# Altium PCB Tigershark 3D.PcbDoc (part 3 of 3)
Units mil, origin at the board's own origin, x right, y up, seen from the top; angles counter-clockwise.
Board outline 6000 x 4000 mil, 4 copper layers (Top Layer, Groun Plane, Power Plane, Bottom Layer); 251 components, 259 nets, 1002 pads, 1752 vias.
Unrouted connection lines stored in the file: 937.
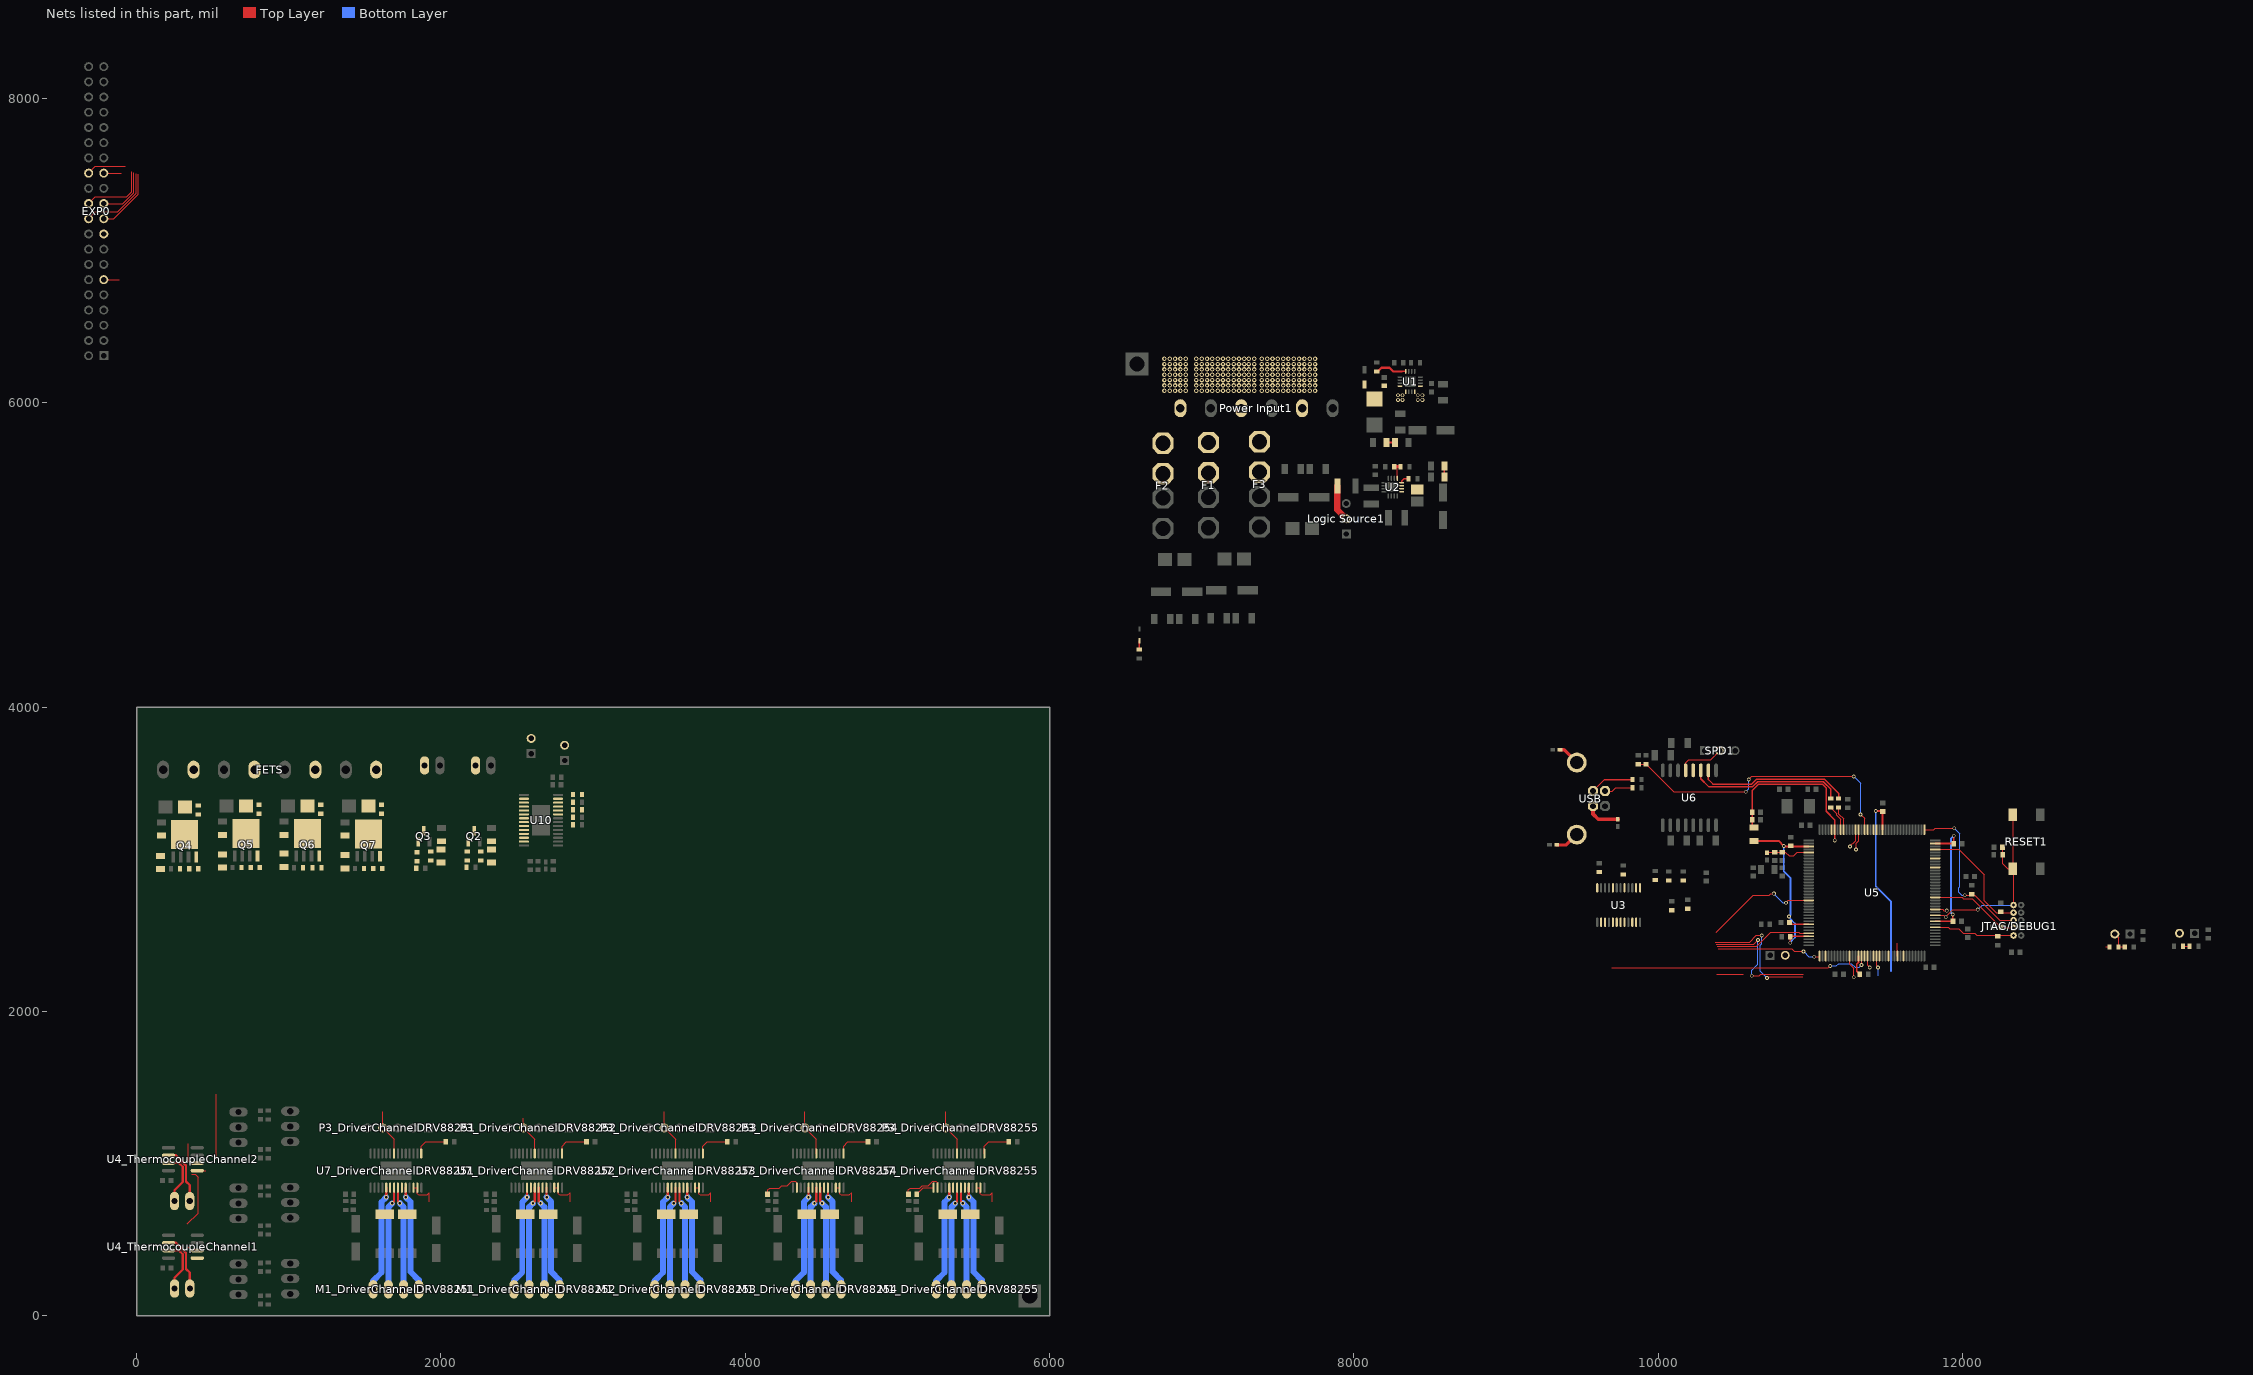
[diagram p5: the nets of this part, all layers, seen from the top]

## Via types
v1: diameter 30, hole 15, Top Layer to Bottom Layer, 1261 vias
v2: diameter 25, hole 15, Top Layer to Bottom Layer, 375 vias
v3: diameter 19.68, hole 7.87, Top Layer to Bottom Layer, 90 vias
v4: diameter 50, hole 20, Top Layer to Bottom Layer, 24 vias
v5: diameter 30, hole 20, Top Layer to Bottom Layer, 2 vias

## Nets (pads, with @x,y where several pads share a name; then routed paths per layer and width w, separated by ;. In a path a pad name is that pad's centre, name@x,y a point inside that pad or via, vN(x,y) a via of type N, cw(c..) or ccw(c..) an arc to the next point about the centre after c; other vN are vias at no path point) (continued)
NetC68_DriverChannelDRV88254_2: C68_DriverChannelDRV88254.2 U7_DriverChannelDRV88254.2 | length 280.9
  Top Layer w8: C68_DriverChannelDRV88254.2@4147.44,800 4147.44,827.44 4160,840 4222.76,840 4239.56,856.8 4276.8,856.8 4306.26,886.26 4328.74,886.26 4339.25,875.75 U7_DriverChannelDRV88254.2@4339.25,842.8
NetC68_DriverChannelDRV88255_1: C68_DriverChannelDRV88255.1 U7_DriverChannelDRV88255.1 | length 128.8
  Top Layer w8: C68_DriverChannelDRV88255.1@5127.56,800 5170.35,842.8 U7_DriverChannelDRV88255.1@5238.66,842.8
NetC68_DriverChannelDRV88255_2: C68_DriverChannelDRV88255.2 U7_DriverChannelDRV88255.2 | length 280.9
  Top Layer w8: C68_DriverChannelDRV88255.2@5072.44,800 5072.44,827.44 5085,840 5147.76,840 5164.56,856.8 5201.8,856.8 5231.26,886.26 5253.74,886.26 5264.25,875.75 U7_DriverChannelDRV88255.2@5264.25,842.8
NetC71_DriverChannelDRV88251_2: C71_DriverChannelDRV88251.2 U7_DriverChannelDRV88251.15 | length 222.1
  Top Layer w8: U7_DriverChannelDRV88251.15@1871.34,1067.2 1871.34,1116.34 1900,1145 C71_DriverChannelDRV88251.2@2032.44,1145
NetC71_DriverChannelDRV88252_2: C71_DriverChannelDRV88252.2 U7_DriverChannelDRV88252.15 | length 222.1
  Top Layer w8: U7_DriverChannelDRV88252.15@2796.34,1067.2 2796.34,1116.34 2825,1145 C71_DriverChannelDRV88252.2@2957.44,1145
NetC71_DriverChannelDRV88253_2: C71_DriverChannelDRV88253.2 U7_DriverChannelDRV88253.15 | length 222.1
  Top Layer w8: U7_DriverChannelDRV88253.15@3721.34,1067.2 3721.34,1116.34 3750,1145 C71_DriverChannelDRV88253.2@3882.44,1145
NetC71_DriverChannelDRV88254_2: C71_DriverChannelDRV88254.2 U7_DriverChannelDRV88254.15 | length 222.1
  Top Layer w8: U7_DriverChannelDRV88254.15@4646.34,1067.2 4646.34,1116.34 4675,1145 C71_DriverChannelDRV88254.2@4807.44,1145
NetC71_DriverChannelDRV88255_2: C71_DriverChannelDRV88255.2 U7_DriverChannelDRV88255.15 | length 222.1
  Top Layer w8: U7_DriverChannelDRV88255.15@5571.34,1067.2 5571.34,1116.34 5600,1145 C71_DriverChannelDRV88255.2@5732.44,1145
NetD1_2: D1.2 R1.1 | length 56.1
  Top Layer w12: R1.1@6590,4379.53 D1.2@6590,4435.63
NetD7_2: D7.2 R8.1 | length 58.5
  Top Layer w15: D7.2@8213.23,5740 R8.1@8271.69,5740
NetD9_2: D9.2 R11.1 | length 70.5
  Top Layer w10: D9.2@8594.92,5585.08 8595,5585 R11.1@8595,5514.58
NetD10_1: D10.1 FAN-1.2 Q2.3 R14.2
NetD10_2: D10.2 R13.2
NetD11_1: D11.1 FAN-2.2 Q3.3
NetD11_2: D11.2 R47.2 R48.2
NetD12_1: D12.1 D13.1 FETS.2 Q4.5 R57.2
NetD13_2: D13.2 R56.1
NetD14_1: D14.1 D15.1 FETS.4 Q5.5 R61.2
NetD14_2: D14.2 R60.1
NetD16_1: D16.1 D17.1 FETS.6 Q6.5 R65.2
NetD16_2: D16.2 R64.1
NetD18_1: D18.1 D19.1 FETS.8 Q7.5 R69.2
NetD18_2: D18.2 R68.1
NetDBGEN1_2: DBGEN1.2 R22.2 R29.1 | length 40.9
  Top Layer w8: R22.2@13449.53,2430 R29.1@13490.47,2430
NetEXP0_17: EXP0.17
NetF1_1: "Power Input1.3" F1.1
  other v1: 6965,6080 7000,6080 7035,6080 7070,6080 7105,6080 7140,6080 7175,6080 7210,6080 7245,6080 7280,6080 7310,6080 7345,6080 6965,6115 7000,6115 7035,6115 7070,6115 7105,6115 7140,6115 7175,6115 7210,6115 7245,6115 7280,6115 7310,6115 7345,6115 6965,6150 7000,6150 7035,6150 7070,6150 7105,6150 7140,6150 7175,6150 7210,6150 7245,6150 7280,6150 7310,6150 7345,6150 6965,6185 7000,6185 7035,6185 7070,6185 7105,6185 7140,6185 7175,6185 7210,6185 7245,6185 7280,6185 7310,6185 7345,6185 6965,6220 7000,6220 7035,6220 7070,6220 7105,6220 7140,6220 7175,6220 7210,6220 7245,6220 7280,6220 7310,6220 7345,6220 6965,6255 7000,6255 7035,6255 7070,6255 7105,6255 7140,6255 7175,6255 7210,6255 7245,6255 7280,6255 7310,6255 7345,6255 6965,6290 7000,6290 7035,6290 7070,6290 7105,6290 7140,6290 7175,6290 7210,6290 7245,6290 7280,6290 7310,6290 7345,6290
NetF2_1: "Power Input1.1" F2.1
  other v1: 6755,6080 6790,6080 6825,6080 6860,6080 6895,6080 6755,6115 6790,6115 6825,6115 6860,6115 6895,6115 6755,6150 6790,6150 6825,6150 6860,6150 6895,6150 6755,6185 6790,6185 6825,6185 6860,6185 6895,6185 6755,6220 6790,6220 6825,6220 6860,6220 6895,6220 6755,6255 6790,6255 6825,6255 6860,6255 6895,6255 6755,6290 6790,6290 6825,6290 6860,6290 6895,6290
NetF3_1: "Power Input1.5" F3.1
  other v1: 7395,6080 7430,6080 7465,6080 7500,6080 7535,6080 7570,6080 7605,6080 7640,6080 7675,6080 7710,6080 7745,6080 7395,6115 7430,6115 7465,6115 7500,6115 7535,6115 7570,6115 7605,6115 7640,6115 7675,6115 7710,6115 7745,6115 7395,6150 7430,6150 7465,6150 7500,6150 7535,6150 7570,6150 7605,6150 7640,6150 7675,6150 7710,6150 7745,6150 7395,6185 7430,6185 7465,6185 7500,6185 7535,6185 7570,6185 7605,6185 7640,6185 7675,6185 7710,6185 7745,6185 7395,6220 7430,6220 7465,6220 7500,6220 7535,6220 7570,6220 7605,6220 7640,6220 7675,6220 7710,6220 7745,6220 7395,6255 7430,6255 7465,6255 7500,6255 7535,6255 7570,6255 7605,6255 7640,6255 7675,6255 7710,6255 7745,6255 7395,6290 7430,6290 7465,6290 7500,6290 7535,6290 7570,6290 7605,6290 7640,6290 7675,6290 7710,6290 7745,6290
NetF4_2: "Logic Source1.2" F4.2 | length 239.5
  Top Layer w40: F4.2@7890.91,5453.58 7890.91,5297.64 7949.96,5238.58
NetFB6_2: FB6.2 USB.6 | length 159.5
  Top Layer w22: FB6.2@9333.62,3095 9397,3095 USB.6@9465,3163
NetFB7_2: FB7.2 USB.4 | length 229.2
  Top Layer w25: USB.4@9572,3350 9572,3298 9606.38,3263.62 FB7.2@9735,3263.62
NetFB8_2: FB8.2 USB.5 | length 146.1
  Top Layer w22: FB8.2@9353.62,3720 9381.22,3720 USB.5@9465,3636.22
"NetFET kRESET_2": "FET kRESET.2" "FET MCU RESET.2" R49.1
NetL2_1: L2.1 U2.1 U2.2 U2.3
NetM1_DriverChannelDRV88251_1: M1_DriverChannelDRV88251.1 U7_DriverChannelDRV88251.5 | length 703.4
  Top Layer w14: v1(1641.02,780) U7_DriverChannelDRV88251.5@1641.02,842.8
  Bottom Layer w39: M1_DriverChannelDRV88251.1@1555,175 1555,230 1610,285 1610,748.98 v1(1641.02,780)
NetM1_DriverChannelDRV88251_2: M1_DriverChannelDRV88251.2 U7_DriverChannelDRV88251.7 | length 683.2
  Top Layer w14: v1(1680,740) 1692.2,752.2 U7_DriverChannelDRV88251.7@1692.2,842.8
  Bottom Layer w39: M1_DriverChannelDRV88251.2@1655,175 1655,715 v1(1680,740)
NetM1_DriverChannelDRV88251_3: M1_DriverChannelDRV88251.3 U7_DriverChannelDRV88251.8 | length 665.9
  Top Layer w14: 1717.8,753.23 U7_DriverChannelDRV88251.8@1717.8,842.8
  Bottom Layer w39: v1(1730,741.02) 1755,716.02 M1_DriverChannelDRV88251.3@1755,175
NetM1_DriverChannelDRV88251_4: M1_DriverChannelDRV88251.4 U7_DriverChannelDRV88251.10 | length 700
  Top Layer w14: v1@1768.98,782.98 U7_DriverChannelDRV88251.10@1768.98,842.8
  Bottom Layer w39: v1(1770,780) 1800,750 1800,290 1855,235 M1_DriverChannelDRV88251.4@1855,175
NetM1_DriverChannelDRV88252_1: M1_DriverChannelDRV88252.1 U7_DriverChannelDRV88252.5 | length 703.4
  Top Layer w14: v1(2566.02,780) U7_DriverChannelDRV88252.5@2566.02,842.8
  Bottom Layer w39: M1_DriverChannelDRV88252.1@2480,175 2480,230 2535,285 2535,748.98 v1(2566.02,780)
NetM1_DriverChannelDRV88252_2: M1_DriverChannelDRV88252.2 U7_DriverChannelDRV88252.7 | length 683.2
  Top Layer w14: v1(2605,740) 2617.2,752.2 U7_DriverChannelDRV88252.7@2617.2,842.8
  Bottom Layer w39: M1_DriverChannelDRV88252.2@2580,175 2580,715 v1(2605,740)
NetM1_DriverChannelDRV88252_3: M1_DriverChannelDRV88252.3 U7_DriverChannelDRV88252.8 | length 665.9
  Top Layer w14: 2642.8,753.23 U7_DriverChannelDRV88252.8@2642.8,842.8
  Bottom Layer w39: v1(2655,741.02) 2680,716.02 M1_DriverChannelDRV88252.3@2680,175
NetM1_DriverChannelDRV88252_4: M1_DriverChannelDRV88252.4 U7_DriverChannelDRV88252.10 | length 700
  Top Layer w14: v1@2693.98,782.98 U7_DriverChannelDRV88252.10@2693.98,842.8
  Bottom Layer w39: v1(2695,780) 2725,750 2725,290 2780,235 M1_DriverChannelDRV88252.4@2780,175
NetM1_DriverChannelDRV88253_1: M1_DriverChannelDRV88253.1 U7_DriverChannelDRV88253.5 | length 703.4
  Top Layer w14: v1(3491.02,780) U7_DriverChannelDRV88253.5@3491.02,842.8
  Bottom Layer w39: M1_DriverChannelDRV88253.1@3405,175 3405,230 3460,285 3460,748.98 v1(3491.02,780)
NetM1_DriverChannelDRV88253_2: M1_DriverChannelDRV88253.2 U7_DriverChannelDRV88253.7 | length 683.2
  Top Layer w14: v1(3530,740) 3542.2,752.2 U7_DriverChannelDRV88253.7@3542.2,842.8
  Bottom Layer w39: M1_DriverChannelDRV88253.2@3505,175 3505,715 v1(3530,740)
NetM1_DriverChannelDRV88253_3: M1_DriverChannelDRV88253.3 U7_DriverChannelDRV88253.8 | length 665.9
  Top Layer w14: 3567.8,753.23 U7_DriverChannelDRV88253.8@3567.8,842.8
  Bottom Layer w39: v1(3580,741.02) 3605,716.02 M1_DriverChannelDRV88253.3@3605,175
NetM1_DriverChannelDRV88253_4: M1_DriverChannelDRV88253.4 U7_DriverChannelDRV88253.10 | length 700
  Top Layer w14: v1@3618.98,782.98 U7_DriverChannelDRV88253.10@3618.98,842.8
  Bottom Layer w39: v1(3620,780) 3650,750 3650,290 3705,235 M1_DriverChannelDRV88253.4@3705,175
NetM1_DriverChannelDRV88254_1: M1_DriverChannelDRV88254.1 U7_DriverChannelDRV88254.5 | length 703.4
  Top Layer w14: v1(4416.02,780) U7_DriverChannelDRV88254.5@4416.02,842.8
  Bottom Layer w39: M1_DriverChannelDRV88254.1@4330,175 4330,230 4385,285 4385,748.98 v1(4416.02,780)
NetM1_DriverChannelDRV88254_2: M1_DriverChannelDRV88254.2 U7_DriverChannelDRV88254.7 | length 683.2
  Top Layer w14: v1(4455,740) 4467.2,752.2 U7_DriverChannelDRV88254.7@4467.2,842.8
  Bottom Layer w39: M1_DriverChannelDRV88254.2@4430,175 4430,715 v1(4455,740)
NetM1_DriverChannelDRV88254_3: M1_DriverChannelDRV88254.3 U7_DriverChannelDRV88254.8 | length 665.9
  Top Layer w14: 4492.8,753.23 U7_DriverChannelDRV88254.8@4492.8,842.8
  Bottom Layer w39: v1(4505,741.02) 4530,716.02 M1_DriverChannelDRV88254.3@4530,175
NetM1_DriverChannelDRV88254_4: M1_DriverChannelDRV88254.4 U7_DriverChannelDRV88254.10 | length 700
  Top Layer w14: v1@4543.98,782.98 U7_DriverChannelDRV88254.10@4543.98,842.8
  Bottom Layer w39: v1(4545,780) 4575,750 4575,290 4630,235 M1_DriverChannelDRV88254.4@4630,175
NetM1_DriverChannelDRV88255_1: M1_DriverChannelDRV88255.1 U7_DriverChannelDRV88255.5 | length 703.4
  Top Layer w14: v1(5341.02,780) U7_DriverChannelDRV88255.5@5341.02,842.8
  Bottom Layer w39: M1_DriverChannelDRV88255.1@5255,175 5255,230 5310,285 5310,748.98 v1(5341.02,780)
NetM1_DriverChannelDRV88255_2: M1_DriverChannelDRV88255.2 U7_DriverChannelDRV88255.7 | length 683.2
  Top Layer w14: v1(5380,740) 5392.2,752.2 U7_DriverChannelDRV88255.7@5392.2,842.8
  Bottom Layer w39: M1_DriverChannelDRV88255.2@5355,175 5355,715 v1(5380,740)
NetM1_DriverChannelDRV88255_3: M1_DriverChannelDRV88255.3 U7_DriverChannelDRV88255.8 | length 665.9
  Top Layer w14: 5417.8,753.23 U7_DriverChannelDRV88255.8@5417.8,842.8
  Bottom Layer w39: v1(5430,741.02) 5455,716.02 M1_DriverChannelDRV88255.3@5455,175
NetM1_DriverChannelDRV88255_4: M1_DriverChannelDRV88255.4 U7_DriverChannelDRV88255.10 | length 700
  Top Layer w14: v1@5468.98,782.98 U7_DriverChannelDRV88255.10@5468.98,842.8
  Bottom Layer w39: v1(5470,780) 5500,750 5500,290 5555,235 M1_DriverChannelDRV88255.4@5555,175
NetQ2_1: Q2.1 R45.2
NetQ3_1: Q3.1 R52.2
NetQ4_4: Q4.4 R58.2
NetQ5_4: Q5.4 R62.2
NetQ6_4: Q6.4 R66.2
NetQ7_4: Q7.4 R70.2
NetR12_1: R12.1 U2.4 | length 60.4
  Top Layer w10: U2.4@8313.76,5476.11 8313.76,5484.65 8331.69,5502.58 R12.1@8358.17,5502.58
NetR14_1: R14.1 U10.3
NetR15_1: R15.1 R16.1 U5.129 | length 1945.3
  Top Layer w8: R15.1@9870,3625.47 R16.1@9920,3625.47 10100.47,3445 v2(10575,3445) ; v2(10595,3525) 10615,3545 v2(11285,3545) ; v2(11330,3295) 11355.79,3269.21 U5.129@11355.79,3195.35
  Bottom Layer w8: v2(10575,3445) 10595,3465 v2(10595,3525) ; v2(11285,3545) 11330,3500 v2(11330,3295)
NetR17_2: R17.2 U6.10 | length 1014.4
  Top Layer w10: U6.10@10330,3585.12 10330,3525 10360,3495 10614.75,3495 10646.75,3527 11093,3527 11185,3435 R17.2@11185,3399.53
NetR18_2: R18.2 USB.2 | length 188.1
  Top Layer w8: USB.2@9651,3449.21 9699.21,3449.21 9720,3470 R18.2@9830.47,3470
NetR19_2: R19.2 U6.11 | length 1026.6
  Top Layer w10: U6.11@10280,3585.12 10280,3530 10331,3479 10621.37,3479 10653.37,3511 11084.86,3511 11135,3460.86 R19.2@11135,3399.53
NetR20_2: R20.2 USB.3 | length 294
  Top Layer w10: USB.3@9572,3449.21 9647.79,3525 9820.47,3525 R20.2@9830.47,3535
NetR23_2: R23.2 R28.2 TRST1.2 | length 136.1
  Top Layer w8: TRST1.2@13000.47,2509.53 13025,2485 R23.2@13025,2424.53 R28.2@13065.94,2424.53
NetR31_1: R31.1 U3.1 U3.12 U3.15 U3.18 U3.19 U3.22
NetR32_DriverChannelDRV88251_2: R32_DriverChannelDRV88251.2 U7_DriverChannelDRV88251.9
NetR32_DriverChannelDRV88252_2: R32_DriverChannelDRV88252.2 U7_DriverChannelDRV88252.9
NetR32_DriverChannelDRV88253_2: R32_DriverChannelDRV88253.2 U7_DriverChannelDRV88253.9
NetR32_DriverChannelDRV88254_2: R32_DriverChannelDRV88254.2 U7_DriverChannelDRV88254.9
NetR32_DriverChannelDRV88255_2: R32_DriverChannelDRV88255.2 U7_DriverChannelDRV88255.9
NetR33_DriverChannelDRV88251_2: R33_DriverChannelDRV88251.2 U7_DriverChannelDRV88251.6
NetR33_DriverChannelDRV88252_2: R33_DriverChannelDRV88252.2 U7_DriverChannelDRV88252.6
NetR33_DriverChannelDRV88253_2: R33_DriverChannelDRV88253.2 U7_DriverChannelDRV88253.6
NetR33_DriverChannelDRV88254_2: R33_DriverChannelDRV88254.2 U7_DriverChannelDRV88254.6
NetR33_DriverChannelDRV88255_2: R33_DriverChannelDRV88255.2 U7_DriverChannelDRV88255.6
NetR37_1: R37.1 R38.2 U2.5 | length 117.4
  Top Layer w8: U2.5@8285.22,5504.65 8285.22,5581.11
  Top Layer w20: R38.2@8265.22,5581.58 R37.1@8306.17,5581.58
NetR39_1: R39.1 U5.65
NetR40_1: R40.1 U5.63 | length 83
  Top Layer w8: U5.63@11572.32,2364.65 11572.32,2447.68
NetR41_1: R41.1 U5.60
NetR42_1: R42.1 U5.57
NetR43_1: R43.1 U5.55
NetR44_1: R44.1 U5.52
NetR45_1: R45.1 R46.1 U10.2
NetR48_1: R48.1 U10.5
NetR49_2: R49.2 U10.27
NetR50_2: R50.2 U10.26
NetR51_2: R51.2 U10.25
NetR52_1: R52.1 R55.1 U10.4
NetR53_2: R53.2 U10.24
NetR54_2: R54.2 U10.23
NetR57_1: R57.1 U10.7
NetR58_1: R58.1 R59.1 U10.6
NetR61_1: R61.1 U10.9
NetR62_1: R62.1 R63.1 U10.8
NetR65_1: R65.1 U10.11
NetR66_1: R66.1 R67.1 U10.10
NetR69_1: R69.1 U10.13
NetR70_1: R70.1 R71.1 U10.12
NetSPD1_2: SPD1.2 U6.13 | length 308
  Top Layer w8: U6.13@10180,3585.12 10180,3635 10200,3655 10345,3655 SPD1.2@10405,3715
NetT2_ThermocoupleChannel1_1: T2_ThermocoupleChannel1.1 U4_ThermocoupleChannel1.3 | length 351.9
  Top Layer w15: U4_ThermocoupleChannel1.3@210.51,430 279.49,430 304.49,405 304.49,305 250,250.51 T2_ThermocoupleChannel1.1@250,180
NetT2_ThermocoupleChannel1_2: T2_ThermocoupleChannel1.2 U4_ThermocoupleChannel1.2 | length 386.5
  Top Layer w15: U4_ThermocoupleChannel1.2@210.51,480 259.49,480 325.49,414 325.49,309 350,284.49 T2_ThermocoupleChannel1.2@350,180
NetT2_ThermocoupleChannel2_1: T2_ThermocoupleChannel2.1 U4_ThermocoupleChannel2.3 | length 351.9
  Top Layer w15: U4_ThermocoupleChannel2.3@210,1005 278.98,1005 303.98,980 303.98,880 249.49,825.51 T2_ThermocoupleChannel2.1@249.49,755
NetT2_ThermocoupleChannel2_2: T2_ThermocoupleChannel2.2 U4_ThermocoupleChannel2.2 | length 386.5
  Top Layer w15: U4_ThermocoupleChannel2.2@210,1055 258.98,1055 324.98,989 324.98,884 349.49,859.49 T2_ThermocoupleChannel2.2@349.49,755
NetU5_140: U5.140 U6.12
PG: R9.2 U1.8 | length 214
  Top Layer w10: 8315,6206.93 U1.8@8340.47,6206.93
  Top Layer w15: R9.2@8146.46,6206.93 8156.93,6206.93 8181,6231 8234,6231 8258.07,6206.93 8315,6206.93
POT_CS: U3.5 U5.39
REF: U7_DriverChannelDRV88251.12 U7_DriverChannelDRV88251.13 U7_DriverChannelDRV88252.12 U7_DriverChannelDRV88252.13 U7_DriverChannelDRV88253.12 U7_DriverChannelDRV88253.13 U7_DriverChannelDRV88254.12 U7_DriverChannelDRV88254.13 U7_DriverChannelDRV88255.12 U7_DriverChannelDRV88255.13 | length 1067.2
  Top Layer w8: U7_DriverChannelDRV88251.12@1820.16,842.8 U7_DriverChannelDRV88251.13@1845.75,842.8 1845.75,804.25 1855,795 1910,795 1925,810 1925,750 ; U7_DriverChannelDRV88252.12@2745.16,842.8 U7_DriverChannelDRV88252.13@2770.75,842.8 2770.75,804.25 2780,795 2835,795 2850,810 2850,750 ; U7_DriverChannelDRV88253.12@3670.16,842.8 U7_DriverChannelDRV88253.13@3695.75,842.8 3695.75,804.25 3705,795 3760,795 3775,810 3775,750 ; U7_DriverChannelDRV88254.12@4595.16,842.8 U7_DriverChannelDRV88254.13@4620.75,842.8 4620.75,804.25 4630,795 4685,795 4700,810 4700,750 ; U7_DriverChannelDRV88255.12@5520.16,842.8 U7_DriverChannelDRV88255.13@5545.75,842.8 5545.75,804.25 5555,795 5610,795 5625,810 5625,750
REF1: U3.2
REF2: U3.23
REF3: U3.20
REF4: U3.17
REF5: U3.14
REF_EXP1: EXP0.21 U5.53 | length 1318.6
  Top Layer w8: EXP0.21@-215,7310 -89.4,7310 -17,7382.4 -17,7513 ; 10382,2442 10627,2442 v2(10655,2470) ; v2(10615,2235) 10665,2235 10675,2245 10953.99,2245 ; U5.53@11375.47,2364.65 11375.47,2304.53 v2(11390,2290)
  Bottom Layer w8: v2(10615,2235) 10615,2270 10655,2310 v2(10655,2470)
REF_EXP2: EXP0.22 U5.47 | length 1461.6
  Top Layer w8: EXP0.22@-315,7310 -270,7355 -64.2,7355 -31,7388.2 -31,7519 ; 10376,2456 10601,2456 10645,2500 v2(10680,2500) ; v2(10715,2220) 10725,2230 10949.2,2230 ; U5.47@11257.36,2364.65 11257.36,2312.44 11285,2284.8 v2(11285,2225)
  Bottom Layer w8: v2(10680,2500) 10680,2445 10670,2435 10670,2265 v2(10715,2220)
RESET: C63.2 JTAG/DEBUG1.10 kRESET.2 R21.1 RESET1.1 U5.83 | length 1336.4
  Top Layer w8: U5.83@11820.35,2632.36 11877.64,2632.36 v2(11890,2620) 11890,2624.38 11935.62,2670 v2(12100,2670) ; C63.2@12262.56,3080 12264.53,3078.03 R21.1@12264.53,3030 12264.53,2970.47 12297.17,2937.83 RESET1.1@12329.45,2937.83 ; RESET1.1@12334.45,3292.17 12334.45,2937.83 12335,2932.28 JTAG/DEBUG1.10@12335,2700
  Bottom Layer w8: v2(12100,2670) 12130,2700 JTAG/DEBUG1.10@12335,2700
RXD1: EXP0.20 U5.32 | length 1153.8
  Top Layer w8: EXP0.20@-315,7210 -270,7255 -124.6,7255 -3,7376.6 -3,7507 ; 10388,2428 10648,2428 10740.28,2520.28 10924.72,2520.28 10930.75,2514.25 U5.32@10989.65,2514.25
SCLK: EXP0.11 R51.1 U3.8 U4_ThermocoupleChannel1.5 U4_ThermocoupleChannel2.5 U5.51 | length 2351.3
  Top Layer w8: EXP0.11@-215,6810 -114.6,6810 ; U4_ThermocoupleChannel2.5@398.98,955 454.49,955 ; U4_ThermocoupleChannel1.5@399.49,380 U4_ThermocoupleChannel1.5@440,380 ; 524,1028.6 524,1455.61 ; 9695.39,2287 11117,2287 v2(11130,2300) ; v2(11336.1,2306.1) U5.51@11336.1,2364.65
  Bottom Layer w8: v2(11130,2300) 11170,2300 11185,2315 11270,2315 11295,2290 11320,2290 v2(11336.1,2306.1)
STEP: P3_DriverChannelDRV88251.4 P3_DriverChannelDRV88252.4 P3_DriverChannelDRV88253.4 P3_DriverChannelDRV88254.4 P3_DriverChannelDRV88255.4 U7_DriverChannelDRV88251.22 U7_DriverChannelDRV88252.22 U7_DriverChannelDRV88253.22 U7_DriverChannelDRV88254.22 U7_DriverChannelDRV88255.22 | length 1488.7
  Top Layer w8: 1617.5,1342.5 P3_DriverChannelDRV88251.4@1617.5,1235 1692.2,1160.3 U7_DriverChannelDRV88251.22@1692.2,1067.2 ; 2542.5,1300 P3_DriverChannelDRV88252.4@2542.5,1235 2617.2,1160.3 U7_DriverChannelDRV88252.22@2617.2,1067.2 ; 3467.5,1342.5 P3_DriverChannelDRV88253.4@3467.5,1235 3542.2,1160.3 U7_DriverChannelDRV88253.22@3542.2,1067.2 ; 4392.5,1342.5 P3_DriverChannelDRV88254.4@4392.5,1235 4467.2,1160.3 U7_DriverChannelDRV88254.22@4467.2,1067.2 ; 5317.5,1342.5 P3_DriverChannelDRV88255.4@5317.5,1235 5392.2,1160.3 U7_DriverChannelDRV88255.22@5392.2,1067.2
STEP1: U5.132 | length 125.6
  Top Layer w8: v2(11260,3085) 11296.73,3121.73 U5.132@11296.73,3195.35
STEP2: U5.131 | length 137.2
  Top Layer w8: v2(11300,3065) 11300,3105 11316.42,3121.42 U5.131@11316.42,3195.35
STEP3: U5.128
STEP4: U5.126
STEP5: U5.125
STEP_EXP1: EXP0.25 U5.56 | length 420.5
  Top Layer w8: EXP0.25@-215,7510 -101.01,7510 ; 10385,2245 10558.18,2245 ; U5.56@11434.53,2364.65 11434.53,2300.47 v2(11445,2290)
  Bottom Layer w8: 11444.94,2235.68 11444.94,2289.94 v2(11445,2290)
STEP_EXP2: EXP0.26 U5.21 | length 1001
  Top Layer w8: EXP0.26@-315,7510 -270,7555 -75.8,7555 ; 10382.5,2522.5 10625,2765 10730,2765 10740,2775 v2(10760,2775) ; v2(10840,2715) 10855.79,2730.79 U5.21@10989.65,2730.79
  Bottom Layer w8: v2(10760,2775) 10820,2715 v2(10840,2715)
SW: C7.1 D5.2 L1.1 U1.1 U1.12 U1.13 U1.16
  other v2: 8290,6020 8320,6020 8420,6020 8450,6020 8290,6050 8320,6050 8420,6050 8450,6050
TC_CS: U4_ThermocoupleChannel1.6 U4_ThermocoupleChannel2.6 | length 632.8
  Top Layer w8: 334.49,605 404.49,675 404.49,910 384.49,930 364.49,930 ; 335,455 360,430 U4_ThermocoupleChannel1.6@399.49,430 ; 339.49,1130 339.49,1020 354.49,1005 U4_ThermocoupleChannel2.6@398.98,1005
TC_CS1: U5.99
TC_CS2: U5.102
TCK/SWDCLK: JTAG/DEBUG1.4 R25.1 U5.89 | length 597.7
  Top Layer w8: U5.89@11820.35,2750.47 11997.71,2750.47 12005.68,2742.5 12062.5,2742.5 12255,2550 JTAG/DEBUG1.4@12335,2550
TDI: JTAG/DEBUG1.8 R27.1 U5.105 | length 786.3
  Top Layer w8: U5.105@11820.35,3065.43 11974.57,3065.43 12142.5,2897.5 12142.5,2727.5 12220,2650 JTAG/DEBUG1.8@12335,2650
TDO/SWO: JTAG/DEBUG1.6 R26.1 U5.109 | length 1074.8
  Top Layer w8: U5.109@11749.49,3195.35 11810.35,3195.35 11820,3205 v2(11945,3205) ; v2(12015,2765) 12080,2765 12245,2600 JTAG/DEBUG1.6@12335,2600
  Bottom Layer w8: v2(11945,3205) 11982.5,3167.5 11982.5,2820.68 11975,2813.18 11975,2785 11995,2765 v2(12015,2765)
TMS/SWDIO: JTAG/DEBUG1.2 R24.1 U5.79 | length 536.9
  Top Layer w8: U5.79@11820.35,2553.62 11906.14,2553.62 11914.77,2545 11975,2545 12005,2515 12079.26,2515 12094.26,2500 JTAG/DEBUG1.2@12335,2500
TRST: R23.1 U5.85 | length 105.2
  Top Layer w8: U5.85@11820.35,2671.73 11868.27,2671.73 11876.63,2663.37 v2(11896.63,2663.37) ; 12940.47,2424.53 R23.1@12965.94,2424.53
TXD1: EXP0.19 U5.37 | length 1114
  Top Layer w8: EXP0.19@-215,7210 -149.8,7210 11,7370.8 11,7501.2 ; 10393.8,2414 10876,2414 10895,2395 v2(10955,2395) ; v2(11025,2360) 11055.87,2360 U5.37@11060.51,2364.65
  Bottom Layer w8: v2(10955,2395) 10990,2360 v2(11025,2360)
UDM_N: R19.1 U5.137 | length 170.3
  Top Layer w8: R19.1@11135,3340.47 11173.94,3301.54 11173.94,3291.06 11200,3265 U5.137@11200,3197.05
UDP_P: R17.1 U5.136 | length 158.8
  Top Layer w8: R17.1@11185,3340.47 11187.94,3337.54 11187.94,3296.86 11217.99,3266.81 U5.136@11217.99,3195.35
VDDIN: C54.2 C55.2 FB5.2 U5.5 | length 296.2
  Top Layer w8: FB5.2@10715,3043.62 10718.94,3047.56 C54.2@10765,3047.56 C55.2@10815,3047.56 10835,3047.56 10860,3022.56 10890,3022.56 10913.19,3045.75 U5.5@10989.65,3045.75
VDDOUT: C36.2 C37.2 C38.2 C39.2 C40.2 C41.2 C42.2 FB4.1 U5.3 U5.29 U5.33 U5.50 U5.81 U5.107 U5.123 | length 3607.4
  Top Layer w12: FB4.1@10630,3121.69 10790.87,3121.69 v2(10825,3087.56) ; v2@10827.56,3085 C36.2@10870,3085 ; v2(10867.56,2452.56) C39.2@10867.56,2492.56 ; C39.2@10867.56,2494.57 U5.33@10989.65,2494.57 ; C40.2@10867.56,2573.31 U5.29@10989.65,2573.31 ; C36.2@10867.56,3085.12 U5.3@10989.65,3085.12 ; U5.50@11316.42,2364.65 11316.42,2324.04 11305,2312.63 11305,2264.88 C41.2@11324.88,2245 C41.2@11324.88,2230.12 ; v2(11430,3317.56) 11472.44,3317.56 C42.2@11473.9,3316.1 ; U5.123@11473.9,3195.35 C42.2@11473.9,3316.1 ; C42.2@11473.9,3317.44 C42.2@11473.9,3316.1 ; C42.2@11475,3315 C42.2@11473.9,3316.1 ; U5.81@11820.35,2592.99 C38.2@11937.01,2592.99 ; U5.107@11820.35,3104.8 C37.2@11942.44,3104.8 ; C38.2@11935,2595 v2(11935,2637.56) ; C38.2@11937.44,2592.56 C38.2@11937.01,2592.99 ; C38.2@11942.44,2592.99 C38.2@11937.01,2592.99 ; C37.2@11942.44,3102.56 C37.2@11942.44,3104.8 ; v2(11942.44,3155) C37.2@11942.44,3104.8
  Bottom Layer w12: v2(10825,3087.56) 10825,2922.56 10870,2877.56 10870,2635 v2(10860,2625) ; v2(10867.56,2452.56) 10867.56,2455.19 10899,2486.63 10899,2578.37 10867.56,2609.81 10867.56,2612.56 ; v2(11430,3317.56) 11430,2822.56 11530,2722.56 11530,2265 ; v2(11935,2637.56) 11925,2647.56 11925,3137.56 v2(11942.44,3155)
VDDPLL: C32.2 C33.2 FB4.2 U5.139 | length 1130.1
  Top Layer w10: FB4.2@10630,3208.31 10617.44,3220.87 C32.2@10617.44,3260 C33.2@10617.44,3310 10617.44,3452.44 10660,3495 11078.23,3495 11103.5,3469.73 11103.5,3316.5 11158.94,3261.06 U5.139@11158.94,3195.35 v2@11158.94,3126.06
  other v2: 11160,3125
pads on no net: JTAG/DEBUG1.1@12416.5,2424.41 JTAG/DEBUG1.7 R22.1 U1.6 U1.7 U3.11 U4_ThermocoupleChannel1.8 U4_ThermocoupleChannel2.8 U5.1 U5.11 U5.17 U5.18 U5.19 U5.66 U5.71 U5.75 U5.76 U5.93 U5.106 U5.108 U5.112 U5.114 U5.116 U5.118 U5.119 U5.121 U5.130 U5.133 U5.144 U7_DriverChannelDRV88251.18 U7_DriverChannelDRV88251.19 U7_DriverChannelDRV88251.23 U7_DriverChannelDRV88251.27 U7_DriverChannelDRV88252.18 U7_DriverChannelDRV88252.19 U7_DriverChannelDRV88252.23 U7_DriverChannelDRV88252.27 U7_DriverChannelDRV88253.18 U7_DriverChannelDRV88253.19 U7_DriverChannelDRV88253.23 U7_DriverChannelDRV88253.27 U7_DriverChannelDRV88254.18 U7_DriverChannelDRV88254.19 U7_DriverChannelDRV88254.23 U7_DriverChannelDRV88254.27 U7_DriverChannelDRV88255.18 U7_DriverChannelDRV88255.19 U7_DriverChannelDRV88255.23 U7_DriverChannelDRV88255.27
copper on no net: | length 3353.9
  Top Layer w8: 1979.53,800 1980,800.47 v1(1980,845) ; 2904.53,800 2905,800.47 v1(2905,845) ; 3829.53,800 3830,800.47 v1(3830,845) ; 4754.53,800 4755,800.47 v1(4755,845) ; 5679.53,800 5680,800.47 v1(5680,845)
  Top Layer w10: 1977.56,750 v1(2025,750) ; 2902.56,750 v1(2950,750) ; 3827.56,750 v1(3875,750) ; 4752.56,750 v1(4800,750) ; 5677.56,750 v1(5725,750)
  Bottom Layer w8: v1(1845,1335) 1845,1305 1860,1290 1860,1145 1890,1115 1890,880 1925,845 v1(1980,845) ; v1(2770,1335) 2770,1305 2785,1290 2785,1145 2815,1115 2815,880 2850,845 v1(2905,845) ; v1(3695,1335) 3695,1305 3710,1290 3710,1145 3740,1115 3740,880 3775,845 v1(3830,845) ; v1(4620,1335) 4620,1305 4635,1290 4635,1145 4665,1115 4665,880 4700,845 v1(4755,845) ; v1(5545,1335) 5545,1305 5560,1290 5560,1145 5590,1115 5590,880 5625,845 v1(5680,845)

## Polygon pours and split planes (outlines as drawn)
+12VCC1 on Top Layer "Top Layer-No Net" (solid, remove dead copper, pour order 104): 23 vertices, not listed, extent 7440,9643.83 8160,10933.83
GND on Top Layer "Top Layer-No Net" (solid, remove dead copper, pour order 77): 4025,1115 4315,1115 4315,1025 4675,1025 4675,1115 4925,1115 4925,875 4660,875 4660,810 4635,810 4635,885 4285,885 4285,875 4025,875
NetR32_DriverChannelDRV88254_2 on Top Layer "Mechanical 15-No Net" (solid, remove dead copper, pour order 70): 4619,645 4491.28,645 4491.28,730 4511,730 4511,864 4524,864 4524,780 4619,718
NetR33_DriverChannelDRV88254_2 on Top Layer "Mechanical 15-No Net" (solid, remove dead copper, pour order 64): 4342,645 4470,645 4470,720 4448,720 4448,754.96 4448.01,861 4436,861 4436,770 4342,721
+12VCC1 on Top Layer "Top Layer-No Net" (solid, remove dead copper, pour order 87): 4025,240 4215,240 4215,290 4150,290 4150,530 4285,530 4285,715 4025,715
+12VCC1 on Top Layer "Top Layer-No Net" (solid, remove dead copper, pour order 82): 4675,715 4925,715 4925,240 4745,240 4745,285 4800,285 4800,530 4675,530
GND on Top Layer "Top Layer-No Net" (solid, remove dead copper, pour order 78): 4950,1115 5240,1115 5240,1025 5600,1025 5600,1115 5850,1115 5850,875 5585,875 5585,810 5560,810 5560,885 5210,885 5210,875 4950,875
NetR32_DriverChannelDRV88255_2 on Top Layer "Mechanical 15-No Net" (solid, remove dead copper, pour order 71): 5544,645 5416.28,645 5416.28,730 5436,730 5436,864 5449,864 5449,780 5544,718
NetR33_DriverChannelDRV88255_2 on Top Layer "Mechanical 15-No Net" (solid, remove dead copper, pour order 65): 5267,645 5395,645 5395,720 5373,720 5373,754.96 5373.01,861 5361,861 5361,770 5267,721
+12VCC1 on Top Layer "Top Layer-No Net" (solid, remove dead copper, pour order 88): 4950,240 5140,240 5140,290 5075,290 5075,530 5210,530 5210,715 4950,715
+12VCC1 on Top Layer "Top Layer-No Net" (solid, remove dead copper, pour order 83): 5600,715 5850,715 5850,240 5670,240 5670,285 5725,285 5725,530 5600,530
GND on Top Layer "Top Layer-No Net" (solid, remove dead copper, pour order 79): 2175,1115 2465,1115 2465,1025 2825,1025 2825,1115 3075,1115 3075,875 2810,875 2810,810 2785,810 2785,885 2435,885 2435,875 2175,875
NetR32_DriverChannelDRV88252_2 on Top Layer "Mechanical 15-No Net" (solid, remove dead copper, pour order 72): 2769,645 2641.28,645 2641.28,730 2661,730 2661,864 2674,864 2674,780 2769,718
NetR33_DriverChannelDRV88252_2 on Top Layer "Mechanical 15-No Net" (solid, remove dead copper, pour order 66): 2492,645 2620,645 2620,720 2598,720 2598,754.96 2598.01,861 2586,861 2586,770 2492,721
+12VCC1 on Top Layer "Top Layer-No Net" (solid, remove dead copper, pour order 89): 2175,240 2365,240 2365,290 2300,290 2300,530 2435,530 2435,715 2175,715
+12VCC1 on Top Layer "Top Layer-No Net" (solid, remove dead copper, pour order 84): 2825,715 3075,715 3075,240 2895,240 2895,285 2950,285 2950,530 2825,530
GND on Top Layer "Top Layer-No Net" (solid, remove dead copper, pour order 80): 3100,1115 3390,1115 3390,1025 3750,1025 3750,1115 4000,1115 4000,875 3735,875 3735,810 3710,810 3710,885 3360,885 3360,875 3100,875
NetR32_DriverChannelDRV88253_2 on Top Layer "Mechanical 15-No Net" (solid, remove dead copper, pour order 73): 3694,645 3566.28,645 3566.28,730 3586,730 3586,864 3599,864 3599,780 3694,718
NetR33_DriverChannelDRV88253_2 on Top Layer "Mechanical 15-No Net" (solid, remove dead copper, pour order 67): 3417,645 3545,645 3545,720 3523,720 3523,754.96 3523.01,861 3511,861 3511,770 3417,721
+12VCC1 on Top Layer "Top Layer-No Net" (solid, remove dead copper, pour order 90): 3100,240 3290,240 3290,290 3225,290 3225,530 3360,530 3360,715 3100,715
+12VCC1 on Top Layer "Top Layer-No Net" (solid, remove dead copper, pour order 85): 3750,715 4000,715 4000,240 3820,240 3820,285 3875,285 3875,530 3750,530
+12VCC1 on Top Layer "Top Layer-No Net" (solid, remove dead copper, pour order 86): 1900,715 2150,715 2150,240 1970,240 1970,285 2025,285 2025,530 1900,530
+12VCC1 on Top Layer "Top Layer-No Net" (solid, remove dead copper, pour order 91): 1250,240 1440,240 1440,290 1375,290 1375,530 1510,530 1510,715 1250,715
NetF3_1 on Top Layer "Top Layer-No Net" (solid, remove dead copper, pour order 106): 7760,6345 7370,6345 7370,5880 7275,5880 7275,5470 7475,5470 7475,5650 7585,5650 7585,5835 7645,5835 7645,5890 7760,5890
NetF1_1 on Top Layer "Top Layer-No Net" (solid, remove dead copper, pour order 102): 7360,6360 6940,6360 6940,5465 7270,5465 7270,5890 7360,5890
NetF2_1 on Top Layer "Top Layer-No Net" (solid, remove dead copper, pour order 99): 6640,5475 6935,5475 6935,6360 6720,6360 6720,6135 6640,6135
+12VCC3 on Top Layer "Top Layer-No Net" (solid, remove dead copper, pour order 103): 18 vertices, not listed, extent 4025,5874.3 5225,6300.7
NetC22_1 on Top Layer "Top Layer-No Net" (solid, remove dead copper, pour order 92): 8029.96,5463.58 8213.69,5464.58 8213.69,5409.58 8231.69,5409.58 8231.69,5370.58 8180.69,5370.58 8180.69,5419.58 8029.96,5418.58 8029.96,5398.58 7984.96,5398.58 7984.96,5508.58 8029.96,5508.58
+5VCC on Top Layer "Mechanical 15-No Net" (solid, pour order 76): 8440,5855 8255,5855 8250,5860 8250,5905 8020,5905 8020,5785 8330,5785 8330,5705 8385,5705 8385,5650 8695,5650 8695,5750 8440,5750
NetR33_DriverChannelDRV88251_2 on Top Layer "Mechanical 15-No Net" (solid, remove dead copper, pour order 68): 1567,645 1695,645 1695,720 1673,720 1673,754.96 1673.01,861 1661,861 1661,770 1567,721
NetR32_DriverChannelDRV88251_2 on Top Layer "Mechanical 15-No Net" (solid, remove dead copper, pour order 74): 1844,645 1716.28,645 1716.28,730 1736,730 1736,864 1749,864 1749,780 1844,718
+12VCC1 on Top Layer "Mechanical 15-No Net" (solid, pour order 61): 8415,6125 8415,6155 8475,6155 8475,6265 8625,6265 8625,6100 8540,6100 8540,6110 8475,6110 8475,6125
SW on Top Layer "Mechanical 15-No Net" (solid, pour order 69): 8470,6115 8405,6115 8405,6100 8395,6100 8395,6000 8470,6000
GND on Top Layer "Mechanical 15-No Net" (solid, pour order 75): 8385,6100 8355,6100 8355,5960 8630,5960 8630,6055 8540,6055 8540,6090 8475,6090 8475,5995 8385,5995
+12VCC1 on Top Layer "Mechanical 15-No Net" (solid, remove dead copper, pour order 62): 8325,6120 8325,6140 8290,6140 8290,6150 8225,6150 8225,6110 8290,6110 8290,6120
SW on Top Layer "Mechanical 15-No Net" (solid, pour order 63): 17 vertices, not listed, extent 8050,5970 8345,6155
GND on Top Layer "Top Layer-No Net" (solid, remove dead copper, pour order 81): 1250,1115 1540,1115 1540,1025 1900,1025 1900,1115 2150,1115 2150,875 1885,875 1885,810 1860,810 1860,885 1510,885 1510,875 1250,875
NetL2_1 on Top Layer "Top Layer-No Net" (solid, remove dead copper, pour order 93): 8297.69,5464.58 8297.69,5408.58 8455.69,5408.58 8455.69,5464.58
NetC24_2 on Top Layer "Top Layer-No Net" (solid, remove dead copper, pour order 95): 8210.69,5481.58 8210.69,5471.58 8185.69,5471.58 8120.69,5471.58 8120.69,5546.58 8160.69,5546.58 8160.69,5481.58
GND on Top Layer "Top Layer-No Net" (solid, remove dead copper, pour order 94): 8259.69,5416.58 8289.69,5416.58 8289.69,5185.58 8055.69,5185.58 8055.69,5361.58 8171.69,5361.58 8171.69,5320.58 8259.69,5320.58
GND on Top Layer "Top Layer-No Net" (solid, remove dead copper, pour order 96): 8057.69,5599.58 8057.69,5472.58 8112.69,5472.58 8112.69,5558.58 8219.69,5558.58 8219.69,5478.58 8273.69,5478.58 8273.69,5527.58 8244.69,5527.58 8244.69,5599.58
3.3VCC on Top Layer "Top Layer-No Net" (solid, remove dead copper, pour order 97): 8461.69,5387.58 8369.69,5387.58 8369.69,5357.58 8308.69,5357.58 8308.69,5185.58 8461.69,5185.58
+12VCC2 on Top Layer "Top Layer-No Net" (solid, remove dead copper, pour order 100): 17 vertices, not listed, extent 6795,8848.83 7190,10033.83
NetF3_1 on Bottom Layer "Top Layer-No Net" (solid, remove dead copper, pour order 105): 7920,10918.83 7530,10918.83 7530,10453.83 7435,10453.83 7435,10043.83 7635,10043.83 7635,10223.83 7745,10223.83 7745,10408.83 7805,10408.83 7805,10463.83 7920,10463.83
NetF1_1 on Bottom Layer "Top Layer-No Net" (solid, remove dead copper, pour order 101): 7520,10933.83 7100,10933.83 7100,10038.83 7430,10038.83 7430,10463.83 7520,10463.83
NetF2_1 on Bottom Layer "Top Layer-No Net" (solid, remove dead copper, pour order 98): 6800,10048.83 7095,10048.83 7095,10933.83 6880,10933.83 6880,10708.83 6800,10708.83
SW on Bottom Layer "Mechanical 15-No Net" (solid, pour order 55): 8270,6080 8470,6080 8470,6000 8270,6000
+12VCC1 on Bottom Layer "Mechanical 15-No Net" (solid, pour order 54): 8540,6141.79 8480,6141.79 8480,6190 8290,6190 8290,6115 8225,6115 8225,6265 8540,6265
+12VCC1 on Power Plane (split plane): 49 vertices, not listed, extent 5512.01,727.01 5587.99,802.99
+12VCC1 on Power Plane (split plane): 49 vertices, not listed, extent 5222.01,732.01 5297.99,807.99
+12VCC1 on Power Plane (split plane): 49 vertices, not listed, extent 4587.01,727.01 4662.99,802.99
+12VCC1 on Power Plane (split plane): 49 vertices, not listed, extent 4297.01,732.01 4372.99,807.99
+12VCC1 on Power Plane (split plane): 49 vertices, not listed, extent 3372.01,732.01 3447.99,807.99
+12VCC1 on Power Plane (split plane): 49 vertices, not listed, extent 3662.01,727.01 3737.99,802.99
+12VCC1 on Power Plane (split plane): 49 vertices, not listed, extent 5142.01,657.01 5217.99,732.99
+12VCC1 on Power Plane (split plane): 49 vertices, not listed, extent 4657.01,657.01 4732.99,732.99
+12VCC1 on Power Plane (split plane): 49 vertices, not listed, extent 5582.01,657.01 5657.99,732.99
+12VCC1 on Power Plane (split plane): 49 vertices, not listed, extent 3732.01,657.01 3807.99,732.99
+12VCC1 on Power Plane (split plane): 49 vertices, not listed, extent 4217.01,657.01 4292.99,732.99
+12VCC1 on Power Plane (split plane): 49 vertices, not listed, extent 2737.01,727.01 2812.99,802.99
+12VCC1 on Power Plane (split plane): 49 vertices, not listed, extent 2447.01,732.01 2522.99,807.99
+12VCC1 on Power Plane (split plane): 49 vertices, not listed, extent 3292.01,657.01 3367.99,732.99
+12VCC1 on Power Plane (split plane): 49 vertices, not listed, extent 1522.01,732.01 1597.99,807.99
+12VCC1 on Power Plane (split plane): 49 vertices, not listed, extent 1812.01,727.01 1887.99,802.99
+12VCC1 on Power Plane (split plane): 49 vertices, not listed, extent 2807.01,657.01 2882.99,732.99
3.3VCC on Power Plane (split plane): 49 vertices, not listed, extent 20.1,20.1 5979.9,3979.9
+12VCC1 on Power Plane (split plane): 49 vertices, not listed, extent 2367.01,657.01 2442.99,732.99
+12VCC1 on Power Plane (split plane): 49 vertices, not listed, extent 1442.01,657.01 1517.99,732.99
+12VCC1 on Power Plane (split plane): 49 vertices, not listed, extent 1882.01,657.01 1957.99,732.99
GND on Groun Plane (split plane): 5979.9,20.1 20.1,20.1 20.1,3979.9 5979.9,3979.9

## Keep-outs
Keep-Out Layer:
  lines w10: 25,25 25,3975 5975,3975 5975,25 25,25

## Other copper
Groun Plane (plane layer: these items are gaps in the copper):
  lines w10: 9735,3795 10060,3470 10545,3470 10545,3035
Power Plane (plane layer: these items are gaps in the copper):
  circle w10: c6745,5375 r66.71
  circle w10: c6745,5175 r66.71
  circle w10: c8220,5855 r39.05
  circle w10: c5180,695 r43.01
  circle w10: c5260,770 r43.01
  circle w10: c5550,765 r43.01
  circle w10: c5620,695 r43.01
  circle w10: c4255,695 r43.01
  circle w10: c4335,770 r43.01
  circle w10: c4625,765 r43.01
  circle w10: c4695,695 r43.01
  circle w10: c3330,695 r43.01
  circle w10: c3410,770 r43.01
  circle w10: c3700,765 r43.01
  circle w10: c3770,695 r43.01
  circle w10: c2405,695 r43.01
  circle w10: c2485,770 r43.01
  circle w10: c2775,765 r43.01
  circle w10: c2845,695 r43.01
  circle w10: c1920,695 r43.01
  circle w10: c1850,765 r43.01
  circle w10: c1560,770 r43.01
  circle w10: c1480,695 r43.01
  lines w10: 1230,0 1225,5 1225,1025 5605,1025 5605,1145 5670,1210 5670,2460 ; 5235,1700 5670,1700 ; 7065,4520 7065,5012.76 7120,5067.76 7120,6145 ; 7515,5265 7515,5535 8010,5535 8010,6040 ; 7875,5100 8380,5605 ; 8220,6110 8225,6110 8295,6110 8295,6155 8220,6155 8220,6110

## Silkscreen, mask and mechanical layers (free items; w line width, h text height)
Top Overlay:
  lines w10: 3915,0 3915,235 3920,240 4000,240 ; 5990,0 6000,-10 ; 5780,40 5960,40 5960,195 5960,220 5780,220 5780,40 ; 6484,6165 6664,6165 6664,6320 6664,6345 6484,6345 6484,6165
  text "Motors/Logic" at 7255,5065 h100 r90
  text "HeatBed" at 6930,5060 h100 r90
  text "MOSFETS" at 6630,5055 h100 r90
  text "G" at 12764,3280 h250
  text "3.3V 2A" at 4880,1705 h100
  text "5V 3A" at 5510,1705 h100
  text "3.3V" at 1945,1355 h100 r90
  text "GND" at 2470,1355 h100 r90
  text "STEP" at 2570,1355 h100 r90
  text "EN" at 2670,1355 h100 r90
  text "DIR" at 2770,1355 h100 r90
  text "3.3V" at 2870,1355 h100 r90
  text "GND" at 3395,1355 h100 r90
  text "STEP" at 3495,1355 h100 r90
  text "EN" at 3595,1355 h100 r90
  text "DIR" at 3695,1355 h100 r90
  text "3.3V" at 3795,1355 h100 r90
  text "GND" at 4320,1355 h100 r90
  text "STEP" at 4420,1355 h100 r90
  text "EN" at 4520,1355 h100 r90
  text "DIR" at 4620,1355 h100 r90
  text "3.3V" at 4720,1355 h100 r90
  text "GND" at 5245,1355 h100 r90
  text "STEP" at 5345,1355 h100 r90
  text "EN" at 5445,1355 h100 r90
  text "DIR" at 5545,1355 h100 r90
  text "3.3V" at 5645,1355 h100 r90
  text "GND" at 1545,1350 h100 r90
  text "STEP" at 1645,1350 h100 r90
  text "EN" at 1745,1350 h100 r90
  text "DIR" at 1845,1350 h100 r90
  text "X" at 6465,1080 h300
  text "Y" at 6475,580 h300
  text "Z" at 6470,75 h300
  text "X" at 1290,50 h300
  text "Y" at 2215,50 h300
  text "Z" at 3150,50 h300
  text "E0" at 3940,50 h300
  text "E1" at 4900,40 h300

## Text inside footprints (layer, text, board x,y; h text height)
FAN-1: Mechanical 16 "1" at 2390.61,3680.06 h62 r180
FAN-2: Mechanical 16 "1" at 2055.61,3680.06 h62 r180
MAX1_EndstopChannel1: Mechanical 16 "1" at 607.5,1402.5 h62 r270
MAX1_EndstopChannel2: Mechanical 16 "1" at 607.5,402.5 h62 r270
MAX1_EndstopChannel3: Mechanical 16 "1" at 607.5,902.5 h62 r270
MIN1_EndstopChannel1: Mechanical 16 "1" at 1072.5,1082.5 h62 r90
MIN1_EndstopChannel2: Mechanical 16 "1" at 1072.5,82.5 h62 r90
MIN1_EndstopChannel3: Mechanical 16 "1" at 1072.5,582.5 h62 r90
T2_ThermocoupleChannel1: Mechanical 16 "1" at 187.5,117.5 h62
T2_ThermocoupleChannel2: Mechanical 16 "1" at 186.99,692.5 h62
U5: Top Overlay "R" at 11552.27,2728.56 h37.2; Top Overlay "TQFP 144" at 11307.64,2673.05 h49.6